# Altium PCB Nixie_Controller.PcbDoc
Units mm, origin at the board's own origin, x right, y up, seen from the top; angles counter-clockwise.
Board outline 43.81 x 37.46 mm, 2 copper layers (Top Layer, Bottom Layer); 26 components, 26 nets, 102 pads, 7 vias.
Unrouted connection lines stored in the file: 19.
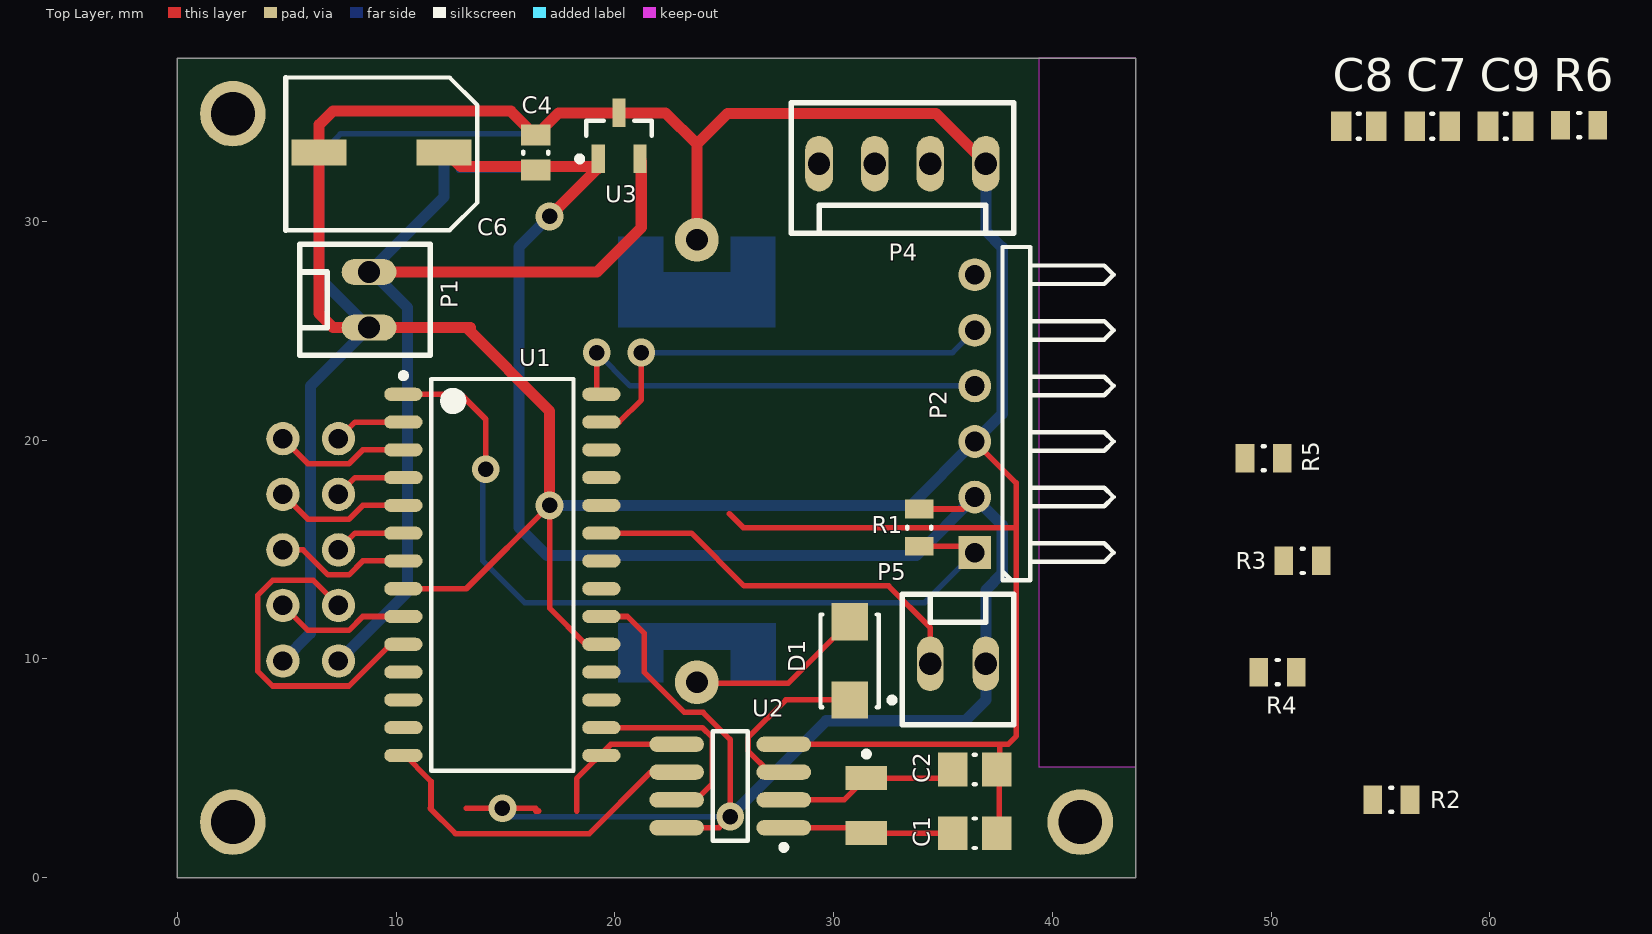
[diagram p0: Top Layer view]
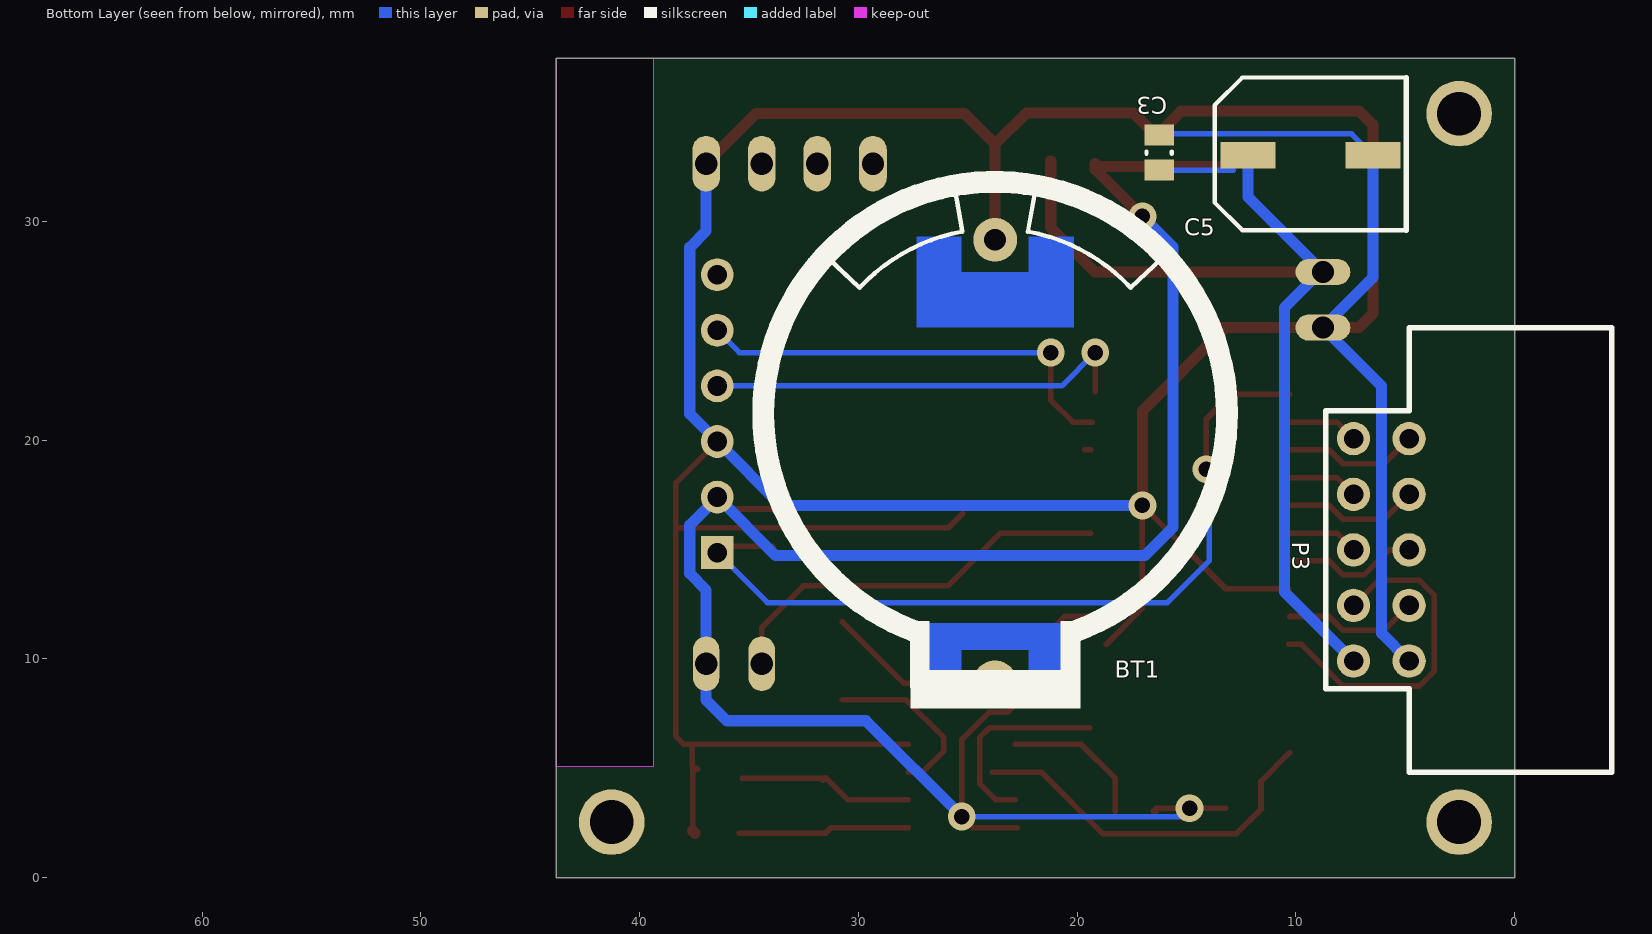
[diagram p1: Bottom Layer view, seen from below]

## Layer stack, top to bottom
Top Layer: signal copper 0.0356
Dielectric: dielectric 0.32, FR-4, Dk 4.8
Bottom Layer: signal copper 0.0356

## Board outline
0,37.465 43.815,37.465 43.815,0 0,0
cut-out: 43.815,37.465 39.37,37.465 39.37,5.08 43.815,5.08

## Design rules (kind name [scope] priority, off if disabled: settings)
Clearance [All] p1: gap=0.254
PolygonConnect [All] p1: connectstyle=Relief reliefconductorwidth=0.254 reliefentries=4 polygonreliefangle="90 Angle" airgapwidth=0.254
RoomDefinition Nixie_Controller [InComponentClass('Nixie_Controller')] p1: confinementstyle=ConfineIn formatcopy=TRUE lockcomponents=FALSE outline 52.324,-1.27 88.9,-1.27 88.9,35.687 52.324,35.687
RoutingVias [All] p1: holewidth=0.711 width=1.27 viastyle="Through Hole" minholewidth=0.711 minwidth=1.27 maxholewidth=0.711 maxwidth=1.27
SolderMaskExpansion [All] p1: expansion=0.102
Width [All] p1: maxlimit=0.762 minlimit=0.254 preferedwidth=0.254
28 further rules are at their usual default settings.

## Components (designator, comment, footprint, x,y, rotation, side; value= is the part's Value field where it differs from the comment)
BT1 "120591-1" TECO-120591-1-2_V 23.749,21.209 r270 bottom
C1 "CAP 18pF 16V 0805(2012)" CAPC0805(2012)100_M 36.449,2.032 r180 top
C2 "CAP 18pF 16V 0805(2012)" CAPC0805(2012)100_M 36.449,4.953 r180 top
C3 "CAP 100nF 16V 0805(2012)" CAPC0805(2012)100_L 16.256,33.147 r270 bottom
C4 "CAP 100nF 16V 0805(2012)" CAPC0805(2012)100_L 16.383,33.147 r270 top
C5 "Polarized capacitor" "Radial Cap 6.3mm" 11.684,33.02 r0 bottom
C6 "Polarized capacitor" "Radial Cap 6.3mm" 11.684,33.147 r0 top
C7 "CAP 100nF 10V 0805(2012)" CAPC0805(2012)100_L 57.361,34.354 r0 top
C8 "CAP 100nF 10V 0805(2012)" CAPC0805(2012)100_L 54.003,34.354 r0 top
C9 "CAP 100pF 10V 0805(2012)" CAPC0805(2012)100_L 60.719,34.354 r0 top
D1 "SS14-E3/5AT" VISH-DO-214AC-2_V 30.734,9.906 r270 top
P1 "Header 1x2" "Header 1x2" 8.763,26.416 r90 top
P2 "ICSP header" HDR1X6H 36.449,14.859 r90 top
P3 "Header 2x5" "Header 2x5" 7.366,20.066 r270 bottom
P4 "Header 1x4" "HEADER 1X4" 36.957,32.639 r180 top
P5 "Header 1x2" "Header 1x2" 35.687,9.779 r0 top
R1 "47K 5% 0805(2012)" RESC0805(2012)_L 33.909,16.002 r90 top
R2 "10K 5% 0805(2012)" RESC0805(2012)_L 55.499,3.556 r180 top
R3 "2K2 5% 0805(2012)" RESC0805(2012)_L 51.435,14.478 r0 top
R4 "2K2 5% 0805(2012)" RESC0805(2012)_L 50.292,9.398 r180 top
R5 "1K 5% 0805(2012)" RESC0805(2012)_L 49.657,19.177 r0 top
R6 "10K 5% 0805(2012)" RESC0805(2012)_L 64.077,34.404 r0 top
U1 "PIC16F722A-I/SO" MCHP-SOIC-SO28_L 14.859,13.843 r0 top
U2 "MCP7940N-I/SN" SOIC-SN8_M 25.273,4.191 r180 top
U3 "LM3480IM3-5.0" MF03A_N 20.193,33.909 r90 top
? "32.768KHz" ABRA-ABS07-2_V 31.496,3.302 r270 top

## Footprints (in the part's own frame and the unit in brackets; to place one, negate y for a bottom-side part, rotate by r counter-clockwise, add the part's x,y. Pads: shape width x height; smd on the part's side, far side on the other; paste and mask are expansions set on the pad)
ABRA-ABS07-2_V [mm] "Hand Drawn, 2-Leads, Body 3.2x1.5mm, Pitch 2.5mm"
  rect 1.1x1.9 smd: 1(-1.25,0) 2(1.25,0)
  silkscreen extent -2.47,-0.12 -2.23,0.13, body extent -1.6,-0.75 1.6,0.75, height 0.9
CAPC0805(2012)100_L [mm] "Chip Capacitor, Body 2.0x1.2mm, Height 1.0mm, IPC High Density"
  rect 0.95x1.35 smd: 1(-0.8,0) 2(0.8,0)
  silkscreen extent -0.05,-0.58 0.05,0.58, body extent -1.1,-0.72 1.1,0.72, height 1
CAPC0805(2012)100_M [mm] "Chip Capacitor, Body 2.0x1.2mm, Height 1.0mm, IPC Low Density"
  rect 1.35x1.55 smd: 1(-1,0) 2(1,0)
  silkscreen extent -0.05,-0.67 0.05,0.67, body extent -1.1,-0.72 1.1,0.72, height 1
HDR1X6H [mm] "Connector; Header; 6 Position; Right Angle"
  rect 1.5x1.5 hole 0.9: 1(0,0)
  round 1.5 hole 0.9: 2(2.54,0) 3(5.08,0) 4(7.62,0) 5(10.16,0) 6(12.7,0)
  silkscreen extent -1.27,-6.35 13.97,-1.27
"Header 1x2" [mm]
  oval 1.2x2.5 hole 1.016: 1(-1.27,0) 2(1.27,0)
  silkscreen extent -2.54,-2.79 2.54,3.17, body extent -2.54,-2.73 2.54,3.11, height 10.03
"HEADER 1X4" [mil]
  oval 50x100 hole 40: 1(0,0) 2(100,0) 3(200,0) 4(300,0)
  silkscreen extent -50,-110 350,125, body extent -50,-105 350,125, height 120
"Header 2x5" [mil]
  round 60 hole 35: 1(0,0) 2(0,100) 3(100,0) 4(100,100) 5(200,0) 6(200,100) 7(300,0) 8(300,100) 9(400,0) 10(400,100)
  silkscreen extent -200,-50 600,465, body extent -200,-15 600,475, height 365
MCHP-SOIC-SO28_L [mm] "SOIC, 28-Leads, Body 17.9x7.5mm, Pitch 1.27mm, IPC High Density"
  oval 1.75x0.6 smd: 1(-4.525,8.255) 2(-4.525,6.985) 3(-4.525,5.715) 4(-4.525,4.445) 5(-4.525,3.175) 6(-4.525,1.905) 7(-4.525,0.635) 8(-4.525,-0.635) 9(-4.525,-1.905) 10(-4.525,-3.175) 11(-4.525,-4.445) 12(-4.525,-5.715) 13(-4.525,-6.985) 14(-4.525,-8.255) 15(4.525,-8.255) 16(4.525,-6.985) 17(4.525,-5.715) 18(4.525,-4.445) 19(4.525,-3.175) 20(4.525,-1.905) 21(4.525,-0.635) 22(4.525,0.635) 23(4.525,1.905) 24(4.525,3.175) 25(4.525,4.445) 26(4.525,5.715) 27(4.525,6.985) 28(4.525,8.255)
  silkscreen extent -4.65,-8.95 3.25,9.23, body extent -3.75,-8.95 3.75,8.95, height 2.65
MF03A_N [mm] "SOT23, 3-Leads, Body 2.9x1.3mm, Pitch 0.95mm, Lead Span 2.4mm, IPC Medium Density"
  rect 1.3x0.6 smd: 1(-1.05,0.95) 2(-1.05,-0.95) 3(1.05,0)
  silkscreen extent -1.17,-1.5 0.7,1.92, body extent -0.7,-1.52 0.7,1.52, height 1.12
"Radial Cap 6.3mm" [mm]
  rect 2.5x1.2 smd: 1(0.508,0) 2(-5.207,0)
  silkscreen extent -6.73,-3.56 2.03,3.43, body extent -5.97,-3.17 1.4,3.17, height 6.1
RESC0805(2012)_L [mm] "Chip Resistor, Body 2.0x1.3mm, IPC High Density"
  rect 0.85x1.3 smd: 1(-0.85,0) 2(0.85,0)
  silkscreen extent -0.05,-0.55 0.05,0.55, body extent -1.1,-0.67 1.1,0.68, height 0.7
SOIC-SN8_M [mm] "SOIC, 8-Leads, Body 4.9x3.9mm, Pitch 1.27mm, IPC Low Density"
  oval 2.5x0.7 smd: 1(-2.45,1.905) 2(-2.45,0.635) 3(-2.45,-0.635) 4(-2.45,-1.905) 5(2.45,-1.905) 6(2.45,-0.635) 7(2.45,0.635) 8(2.45,1.905)
  silkscreen extent -2.58,-2.5 0.8,2.93, body extent -2,-2.5 2,2.5, height 1.75
TECO-120591-1-2_V [mm] "Lithium Battery Holder"
  round 2 hole 1: 1(12.275,0) 2(-7.95,0)
  Top Layer region: -6.475,3.6 -3.95,3.6 -3.95,-3.6 -6.475,-3.6
  Top Layer region: -8.091,1.527 -8.091,3.602 -3.941,3.602 -3.941,1.527
  Top Layer region: -3.959,-1.527 -3.959,-3.602 -8.109,-3.602 -8.109,-1.527
  Top Layer region: 9.573,1.534 9.573,3.609 12.298,3.609 12.298,1.534
  Top Layer region: 12.302,-1.534 12.302,-3.609 9.577,-3.609 9.577,-1.534
  Top Layer region: 10.802,-3.609 9.577,-3.609 9.577,3.591 10.802,3.591
  silkscreen extent -10.6,-10.6 13.47,10.6, body extent -10.62,-10.59 13.17,10.63, height 10
VISH-DO-214AC-2_V [mm] "SMA, 2-Leads, Body 4.245x2.665mm, Height 2.29mm"
  rect 1.7x1.68 smd: 1(-1.79,0) 2(1.79,0)
  silkscreen extent -2.12,-1.33 2.12,2.06, body extent -2.57,-1.33 2.57,1.33, height 2.29

## Part data
BT1: library part CMP-0438-00001-1, "Lithium Battery Holder for CR2032 3V Cell"
C1 C2: library part CMP-1036-01121-1, "CAP 18pF 16V ±5% 0805 (2012 Metric) Thickness 1mm SMD"
C3 C4: library part CMP-1036-04405-1, "CAP 100nF 16V ±20% 0805 (2012 Metric) Thickness 1mm SMD"
C5 C6: library part CAP
C7 C8: library part CMP-1036-04393-1, "CAP 100nF 10V ±5% 0805 (2012 Metric) Thickness 1mm SMD"
C9: library part CMP-1036-01930-1, "CAP 100pF 10V ±2% 0805 (2012 Metric) Thickness 1mm SMD"
D1: library part CMP-0549-00004-1, "Schottky Barrier Rectifier, 40 V Maximum DC Blocking Voltage, -65 to 125 degC, 2-Pin SMA Case, RoHS"
P1 P5: "TE 640456-2"
P2: library part "Header 6H", "Header, 6-Pin, Right Angle"
P3: library part "Header IDC10", "TE 5103310-1"
P4: "TE 640456-4"
R1: library part CMP-1013-00114-1, "47K 0.125W 5% 0805 (2012 Metric)  SMD"
R2 R6: library part CMP-1013-00098-1, "10K 0.125W 5% 0805 (2012 Metric)  SMD"
R3 R4: library part CMP-1013-00082-1, "2K2 0.125W 5% 0805 (2012 Metric)  SMD"
R5: library part CMP-1013-00074-1, "1K 0.125W 5% 0805 (2012 Metric)  SMD"
U1: library part CMP-0115-02602-1, "Flash Microcontroller with nanoWatt XLP Technology, 20 MHz, 24 I/O, -40 to 85 degC, 28-pin SOIC (SO28), Tube"
U2: library part CMP-0186-00196-1, "Low-Cost I2C Real-Time Clock/Calendar with SRAM and Battery Switchover, 8-Pin SOIC, Industrial Temperature"
U3: library part CMP-0062-02200-1, "100 mA, Quasi Low-Dropout Linear Voltage Regulator, 3-pin SOT-23, Pb-Free"
?: library part CMP-0447-00001-1, "Crystal, 32.768 kHz, 12.5 pF, -40 to 85 degC, SMD Low Profile 3.2 x 1.5 x 0.9 mm, Tape and Reel"

## Free pads (board coordinates)
  round 3 hole 2: 1(2.54,34.925) 2(2.54,2.54) 3(41.275,2.54)

## Via types
v1: diameter 1.27, hole 0.711, Top Layer to Bottom Layer, 7 vias

## Nets (pads, with @x,y where several pads share a name; then routed paths per layer and width w, separated by ;. In a path a pad name is that pad's centre, name@x,y a point inside that pad or via, vN(x,y) a via of type N, cw(c..) or ccw(c..) an arc to the next point about the centre after c; other vN are vias at no path point)
ANODE1: P3.1 U1.2 | length 3.3
  Top Layer w0.254: P3.1 8.128,20.828 U1.2
ANODE2: P3.2 U1.3 | length 6.2
  Top Layer w0.254: P3.2 5.969,18.923 7.839,18.923 8.474,19.558 U1.3
ANODE3: P3.3 U1.4 | length 3.3
  Top Layer w0.254: P3.3 8.128,18.288 U1.4
ANODE4: P3.4 U1.5 | length 6.2
  Top Layer w0.254: P3.4 5.969,16.383 7.839,16.383 8.474,17.018 U1.5
DIGIT1: P3.5 U1.6 | length 3.3
  Top Layer w0.254: P3.5 8.128,15.748 U1.6
DIGIT2: P3.6 U1.7 | length 6.2
  Top Layer w0.254: P3.6 5.75,14.986 6.893,13.843 7.839,13.843 8.474,14.478 U1.7
DIGIT3: P3.7 U1.10 | length 15.6
  Top Layer w0.254: P3.7 6.223,13.589 4.353,13.589 3.683,12.919 3.683,9.433 4.353,8.763 7.839,8.763 9.744,10.668 U1.10
DIGIT4: P3.8 U1.9 | length 6.2
  Top Layer w0.254: P3.8 5.969,11.303 7.839,11.303 8.474,11.938 U1.9@10.287,11.938
GND: BT1.2 C1.1 C2.1 C3.1 C4.1 C5.2 C6.2 C7.1 C8.1 C9.1 P1.1 P2.3 P3.10 P4.1 R6.1 U1.8 U1.19 U2.4 U3.3 | length 191.7
  Top Layer w0.254: U1.8 13.208,13.208 v1(17.018,17.018) 17.018,12.319 U1.19@18.669,10.668 ; 25.234,16.637 25.869,16.002 38.227,16.002 ; U2.4 27.736,6.109 37.986,6.109 ; P2.3 38.341,18.047 38.341,15.062 38.354,15.05 38.354,6.477 37.986,6.109 ; C2.1@37.338,4.953 C2.1@37.393,5.008 ; C2.1 37.592,5.096 37.592,6.096 ; C1.1@37.576,2.143 C2.1@37.576,4.953 ; 37.973,6.096 37.986,6.109
  Top Layer w0.508: C6.2@6.477,33.02 6.477,25.781 7.112,25.146 P1.1 13.208,25.146 ; C6.2 6.477,34.417 7.112,35.052 15.24,35.052 16.383,33.909 17.433,34.959 U3.3 22.318,34.959 23.749,33.528 ; 13.397,25.146 13.208,25.146 ; v1(17.018,17.018) 17.018,21.336 13.208,25.146 ; BT1.2@23.749,29.083 BT1.2 23.749,33.528 ; P4.1 34.671,34.925 25.146,34.925 23.749,33.528 ; C1.1@37.465,2.032 C1.1@37.576,2.143
  Bottom Layer w0.254: C5.2 7.458,34.001 16.202,34.001 C3.1
  Bottom Layer w0.508: P3.10 6.096,11.176 6.096,22.479 P1.1 6.477,27.432 C5.2 ; v1@16.891,17.018 v1(17.018,17.018) 33.528,17.018 P2.3 37.707,21.197 37.707,28.817 36.957,29.567 P4.1
Net_1: ?.1 C2.2 U2.2 | length 8.2
  Top Layer w0.254: U2.2 30.48,3.556 31.496,4.572 ?.1@31.516,4.552 ; ?.1 ?.1@31.516,4.552 ; ?.1@31.623,4.445 ?.1@31.516,4.552 ; C2.2@35.306,4.552 ?.1@31.516,4.552
Net_2: ?.2 C1.2 U2.1 | length 7.8
  Top Layer w0.254: U2.1 31.242,2.286 31.496,2.032 C1.2@35.433,2.032
NetBT1_1: BT1.1 D1.1 | length 8.1
  Top Layer w0.254: BT1.1@23.749,8.89 27.928,8.89 D1.1
NetC9_2: C9.2 R5.2 U2.3
NetD1_2: D1.2 R5.1 | length 8
  Top Layer w0.254: 27.723,4.826 27.059,4.826 26.092,5.793 26.092,6.399 27.821,8.128 D1.2@30.734,8.128
NetP2_1: P2.1 R1.1 U1.1 | length 37.2
  Top Layer w0.254: U1.1@10.287,22.098 U1.1 12.954,22.098 14.097,20.955 v1(14.097,18.669) ; R1.1 P2.1@36.156,15.152
  Bottom Layer w0.254: v1@13.97,18.629 13.97,14.478 15.875,12.573 34.163,12.573 P2.1
NetP2_4: P2.4 U1.28 | length 19.7
  Top Layer w0.254: U1.28@19.177,22.225 v1(19.177,24.003)
  Bottom Layer w0.254: v1(19.177,24.003) 20.701,22.479 P2.4
NetP2_5: P2.5 U1.27 | length 20.4
  Top Layer w0.254: U1.27@19.304,20.828 U1.27 20.193,20.828 21.209,21.844 v1(21.209,24.003)
  Bottom Layer w0.254: v1@21.209,24.257 v1(21.209,24.003) 35.433,24.003 P2.5
NetP4_2: P4.2 U1.24
NetP4_3: P4.3 U1.25 | length 1.1
  Top Layer w0.254: P4.3 P4.3@31.877,33.782
NetP4_4: P4.4 U1.26 | length 0.3
  Top Layer w0.254: U1.26 U1.26@19.652,19.558
NetP5_1: P5.1 R6.2 U1.23 | length 18.5
  Top Layer w0.254: U1.23 23.495,15.748 25.908,13.335 32.512,13.335 34.417,11.43 P5.1
RTC_MFP: R2.1 U1.16 U2.7 | length 9.3
  Top Layer w0.254: U1.16@19.431,6.858 23.995,6.858 24.454,6.399 24.454,4.296 23.714,3.556 U2.7
SCL: R3.1 U1.14 U2.6 | length 17
  Top Layer w0.254: U1.14@10.287,5.715 11.596,4.406 11.596,3.175 ; 11.557,3.175 12.715,2.017 18.832,2.017 21.641,4.826 U2.6 U2.6@23.876,4.826
SDA: R4.1 U1.15 U2.5 | length 6.7
  Top Layer w0.254: 18.249,3.048 18.249,4.533 19.812,6.096 U2.5
VCC: C4.2 C6.1 C7.2 C8.2 P2.2 P5.2 R1.2 R2.2 R3.2 R4.2 U1.20 U2.8 U3.1 | length 102.9
  Top Layer w0.254: 13.208,3.175 13.296,3.175 v1(14.859,3.175) 16.383,3.175 ; 16.383,3.048 16.51,3.048 ; U1.20 20.574,11.938 21.336,11.176 21.336,9.394 23.177,7.553 24.037,7.553 25.273,6.317 v1@25.273,2.921 ; U2.8@22.733,2.286 U2.8 24.765,2.286 v1(25.273,2.794) ; R1.2 35.902,16.852
  Top Layer w0.508: C6.1@12.319,33.147 12.954,32.512 U3.1@19.177,32.512 ; v1(17.018,30.226) 19.177,32.385 U3.1@19.177,32.512 ; U3.1@19.177,32.639 U3.1@19.177,32.512
  Bottom Layer w0.254: v1(14.859,3.175) 15.24,2.794 v1(25.273,2.794)
  Bottom Layer w0.508: v1(17.018,30.226) 15.621,28.829 15.621,16.002 16.891,14.732 33.782,14.732 P2.2 ; v1(25.273,2.794) 29.651,7.172 36.001,7.172 36.957,8.128 P5.2 36.957,13.149 37.707,13.899 37.707,16.117 P2.2@36.449,17.375
VIN: C3.2 C5.1 P1.2 P3.9 U3.2 | length 46.3
  Top Layer w0.508: P1.2 19.177,27.686 21.209,29.718 U3.2@21.209,32.766
  Bottom Layer w0.254: 12.865,32.347 C3.2
  Bottom Layer w0.508: P3.9 10.521,13.061 10.521,26.055 P1.2@8.826,27.749 ; P1.2 P1.2@8.826,27.749 ; C5.1 12.192,31.115 P1.2@8.826,27.749
pads on no net: P2.6 U1.11 U1.12 U1.13 U1.17 U1.18 U1.21 U1.22

## Dimensions
2.54,2.54 to 2.54,34.925 on Top Layer
0,0 to 0,37.465 on Top Layer
2.54,2.54 to 41.275,2.54 on Top Layer
0,0 to 43.815,0 on Top Layer